# Altium PCB circuit.PcbDoc
Units mm, origin at the board's own origin, x right, y up, seen from the top; angles counter-clockwise.
Board outline 132 x 119 mm, 2 copper layers (Top Layer, Bottom Layer); 26 components, 21 nets, 104 pads, 2 vias.
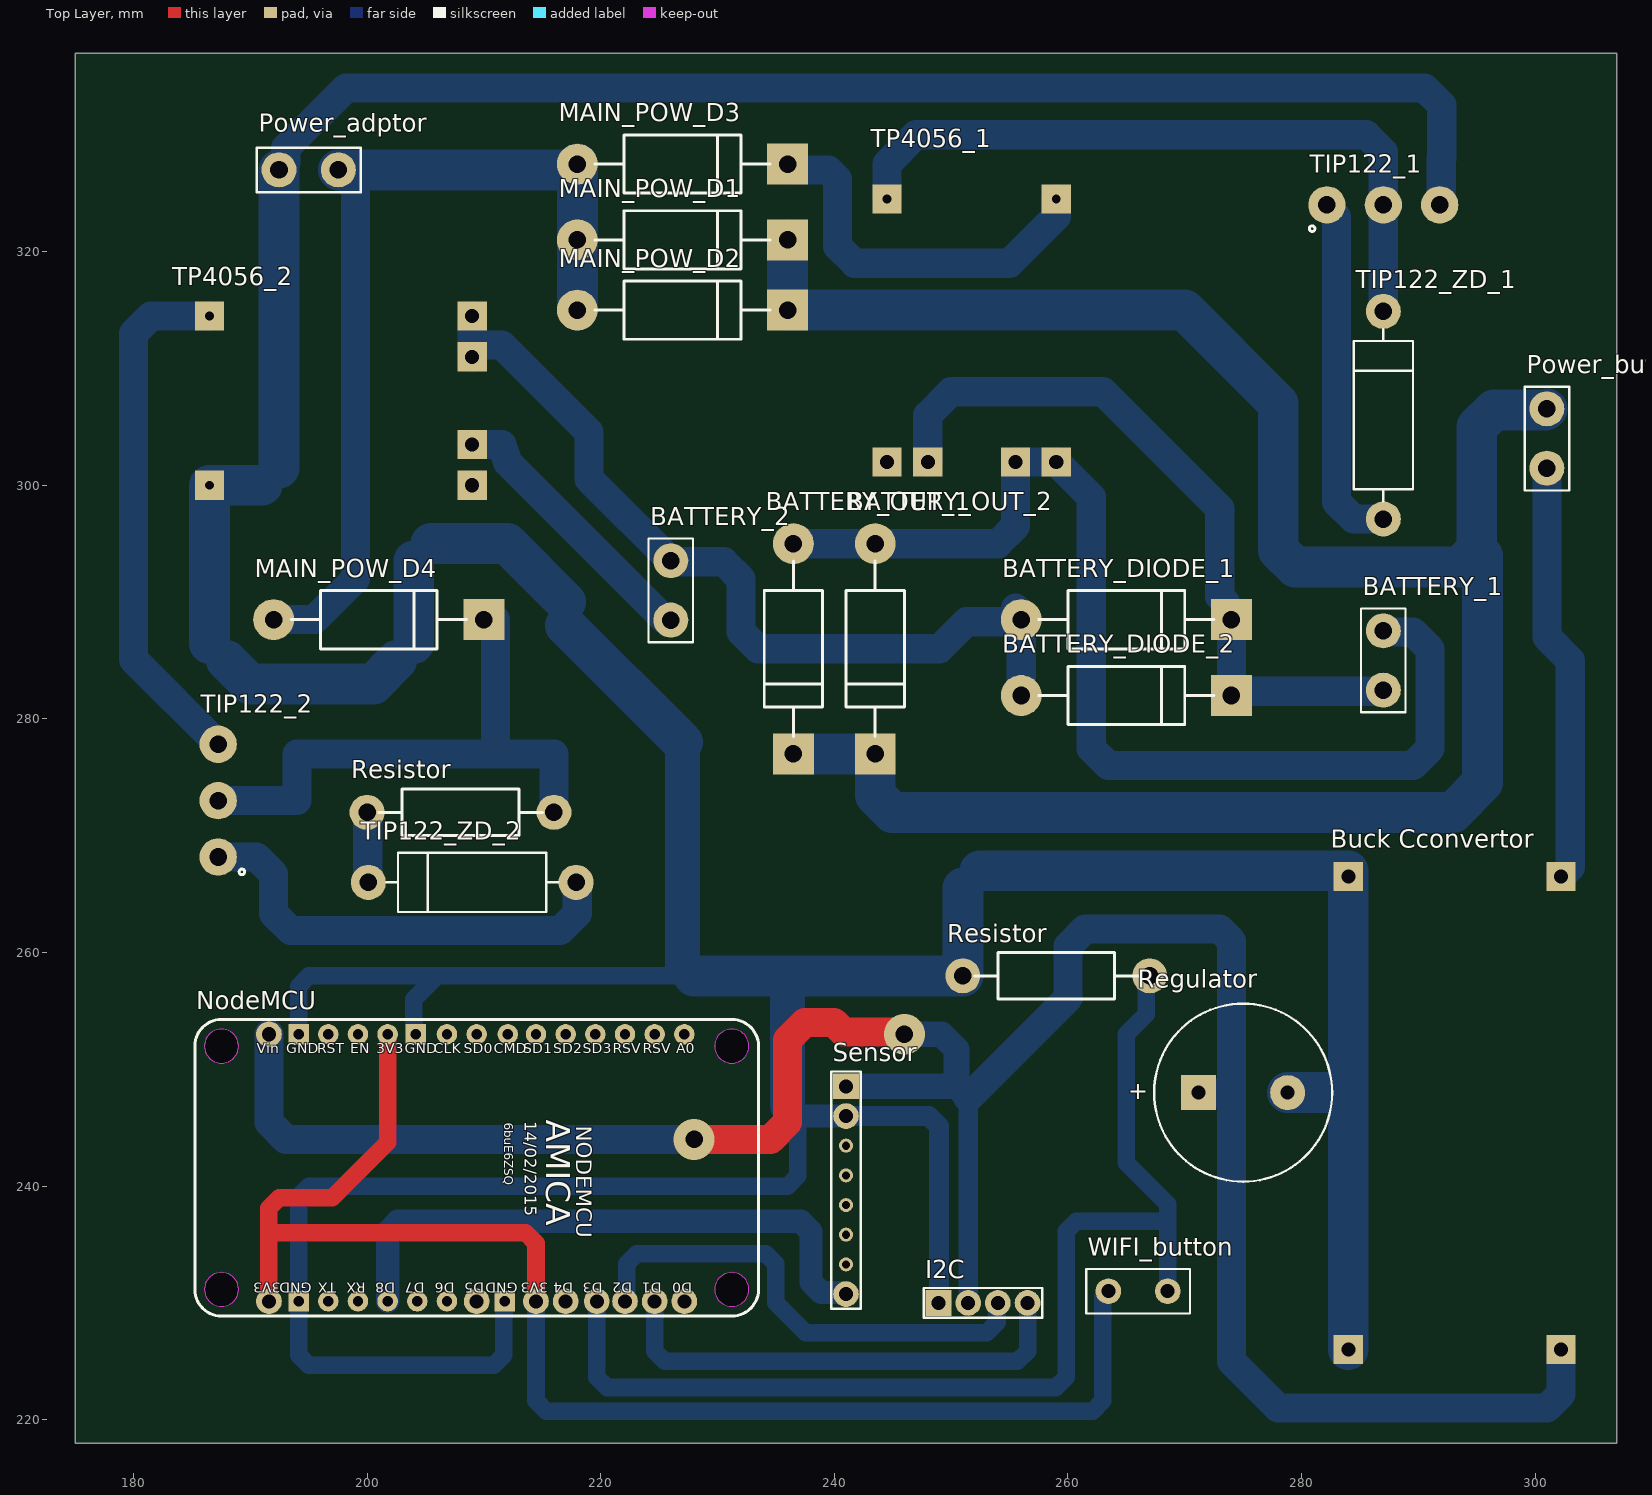
[diagram p0: Top Layer view]
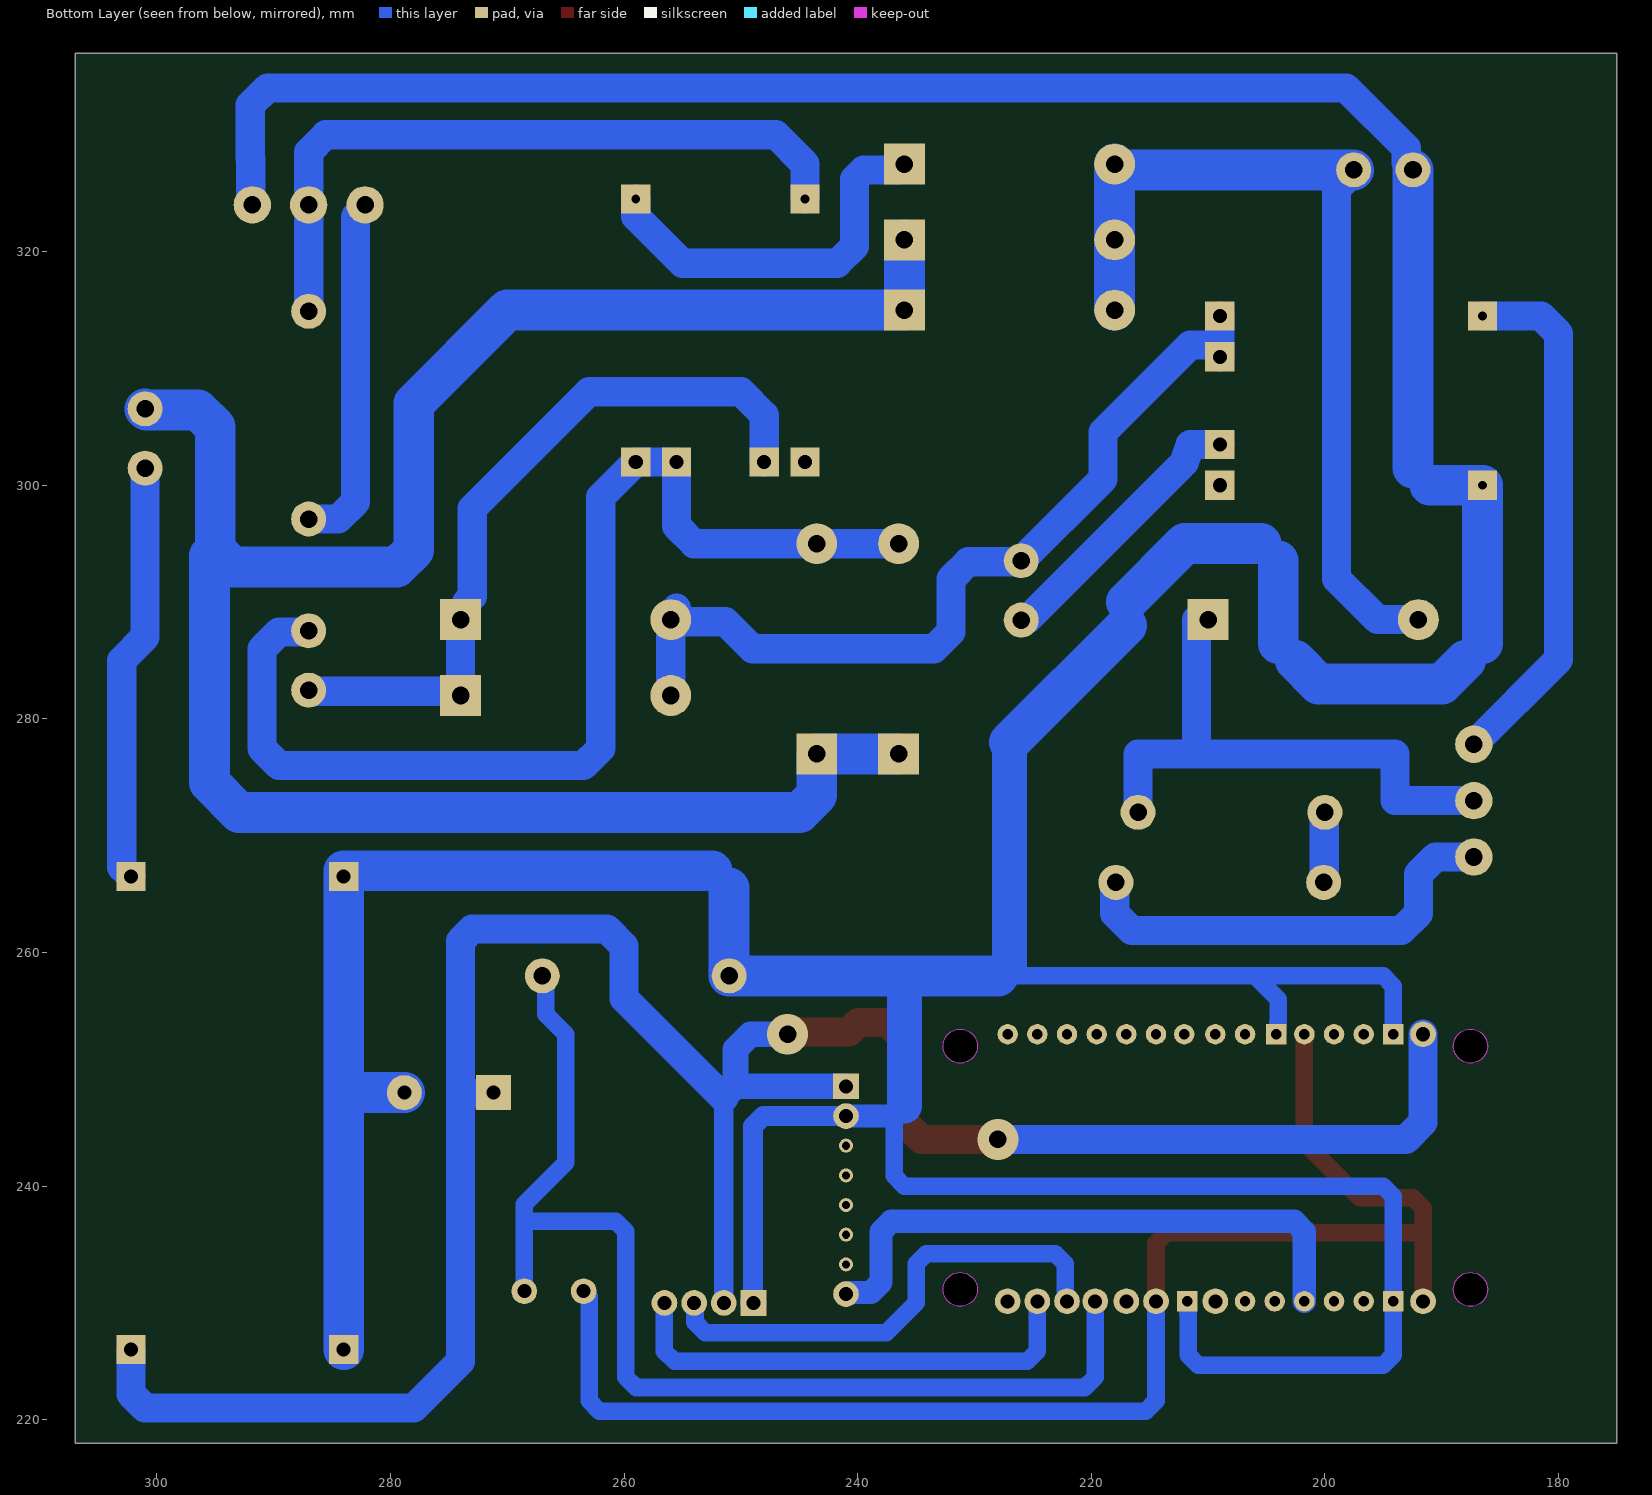
[diagram p1: Bottom Layer view, seen from below]

## Layer stack, top to bottom
Top Solder: solder mask 0.0102, Solder Resist, Dk 3.5
Top Layer: signal copper 0.0356
Dielectric 1: dielectric 0.32, FR-4, Dk 4.8
Bottom Layer: signal copper 0.0356
Bottom Solder: solder mask 0.0102, Solder Resist, Dk 3.5

## Board outline
175,337 307,337 307,218 175,218

## Design rules (kind name [scope] priority, off if disabled: settings)
Clearance [All] p1: gap=0.5 ignorepadtopadclearanceinfootprint=FALSE
PolygonConnect [All] p1: connectstyle=Relief reliefconductorwidth=0.254 reliefentries=4 polygonreliefangle="90 Angle" airgapwidth=0.254
RoomDefinition circuit [InComponentClass('circuit')] p1: confinementstyle=ConfineIn formatcopy=TRUE lockcomponents=FALSE outline 0,0 50.8,0 50.8,25.4 0,25.4
RoutingVias [All] p1: holewidth=0.711 width=1.27 viastyle="Through Hole" minholewidth=0.711 minwidth=1.27 maxholewidth=0.711 maxwidth=1.27
SolderMaskExpansion [All] p1: expansion=0.102 istentingtop=FALSE
Width [All] p1: maxlimit=5 minlimit=0.254 preferedwidth=2.5
30 further rules are at their usual default settings.

## Components (designator, comment, footprint, x,y, rotation, side; value= is the part's Value field where it differs from the comment)
BATTERY_1 "Jumper" RAD-0.2#1 287,285 r270 top
BATTERY_2 "Jumper" RAD-0.2#1 226,291 r270 top
BATTERY_DIODE_1 "Component_1" PCBComponent_1#1 260,286 r0 top
BATTERY_DIODE_2 "Component_1" PCBComponent_1#1 260,279.5 r0 top
BATTERY_OUT_1 "Component_1" PCBComponent_1#1 234,291 r270 top
BATTERY_OUT_2 "Component_1" PCBComponent_1#1 241,291 r270 top
"Buck Cconvertor" "Component_1" PCBComponent_1#2 282.4,268.1 r270 top
I2C "Header 4" HDR1X4 248.92,230 r0 top
MAIN_POW_D1 "Component_1" PCBComponent_1#1 222,318.5 r0 top
MAIN_POW_D2 "Component_1" PCBComponent_1#1 222,312.5 r0 top
MAIN_POW_D3 "Component_1" PCBComponent_1#1 222,325 r0 top
MAIN_POW_D4 "Component_1" PCBComponent_1#1 196,286 r0 top
NodeMCU "NodeMCU V1.0 ESP-12E" "NodeMCU V1.0 ESP-12E" 233.408,254.295 r270 top
Power_adptor "Jumper" RAD-0.2#1 195,327 r0 top
Power_button "Jumper" RAD-0.2#1 301,304 r270 top
Regulator "Cap Pol1" RB7.6-15 275,248 r180 top value=440uF
Resistor "470" PCBComponent_1#3 211,273 r180 top
Resistor "Component_1" PCBComponent_1#3 262,259 r180 top
Sensor "Header 8" HDR1X8 241,248.54 r270 top
TIP122_1 "Component_1" PCBComponent_1#4 287,324.254 r180 top
TIP122_2 "Component_1" PCBComponent_1#4 187,273 r270 top
TIP122_ZD_1 "6.2V" DIODE-0.7 287,306 r90 top
TIP122_ZD_2 "6.2V" DIODE-0.7 209,266 r180 top
TP4056_1 "Charging module of single cell" PCBComponent_1#5 243,327.8 r270 top
TP4056_2 "Charging module of single cell" PCBComponent_1#5 183.2,298.5 r0 top
WIFI_button "Jumper" RAD-0.2#2 266,231 r180 top

## Footprints (in the part's own frame and the unit in brackets; to place one, negate y for a bottom-side part, rotate by r counter-clockwise, add the part's x,y. Pads: shape width x height; smd on the part's side, far side on the other; paste and mask are expansions set on the pad)
DIODE-0.7 [mm] "Diode, Thru-Hole; 2 Leads; 0.7 in Pin Spacing"
  round 3 hole 1.5: 1(-8.89,0) 2(8.89,0)
  silkscreen extent -7.37,-2.54 7.37,2.54
HDR1X4 [mm] "Connector; Header; 4 Position"
  rect 2.2x2.2 hole 1.2: 1(0,0)
  round 2.2 hole 1.2: 2(2.54,0) 3(5.08,0) 4(7.62,0)
  silkscreen extent -1.27,-1.27 8.89,1.27
HDR1X8 [mm] "Connector; Header; 8 Position"
  rect 2.2x2.2 hole 1.2: 1(0,0)
  round 2.2 hole 1.2: 2(2.54,0) 8(17.78,0)
  round 1.2 hole 0.7: 3(5.08,0) 4(7.62,0) 5(10.16,0) 6(12.7,0) 7(15.24,0)
  silkscreen extent -1.27,-1.27 19.05,1.27
"NodeMCU V1.0 ESP-12E" [mil]
  round 115 hole 115 unplated paste-300 mask-300: 0(91,-86) 0(91,-1806) 0(911,-86) 0(911,-1806)
  round 69 hole 35: 3V3(51,-1246) A0(51,-246) CLK(51,-1046) CMD(51,-841) D6(951,-1046) D7(951,-1146) D8(951,-1246) EN(51,-1346) RST(51,-1446) RSV(51,-346) RSV(51,-446) RX(951,-1346) SD0(51,-946) SD1(51,-746) SD2(51,-646) SD3(51,-546) TX(951,-1446)
  round 86.61 hole 47.24: 3V3(951,-746) 3V3(951,-1646) D0(951,-246) D1(951,-346) D2(951,-446) D3(951,-541) D4(951,-646) D5(951,-946) VIN(51,-1646)
  rect 69x69 hole 35: GND(51,-1151) GND(51,-1546) GND(951,-851) GND(951,-1546)
  Keep-Out Layer circle w2: c911,-1806 r57.5
  Keep-Out Layer circle w2: c91,-1806 r57.5
  Keep-Out Layer circle w2: c911,-86 r57.5
  Keep-Out Layer circle w2: c91,-86 r57.5
  silkscreen extent 1,-1896 1001,4
PCBComponent_1#1 [mm]
  rect 3.5x3.5 hole 1.5: 1(14,2.5)
  round 3.5 hole 1.5: 2(-4,2.5)
  silkscreen extent -2.5,0 12.5,5
PCBComponent_1#2 [mm]
  rect 2.5x2.5 hole 1.2: 1(1.6,19.8) 2(1.6,1.6) 3(42.1,19.8) 4(42.1,1.6)
  body extent 0,0 43.7,21.4, height 2.5
PCBComponent_1#3 [mm]
  round 3 hole 1.5: 1(11,1) 2(-5,1)
  silkscreen extent -4,-1 10,3
PCBComponent_1#4 [mm]
  round 3.2 hole 1.5: 1(4.826,0.254) 2(0,0.254) 3(-4.826,0.254)
  silkscreen extent 5.86,2.05 6.33,2.52, body extent -6.5,-1.5 6.5,3, height 6
PCBComponent_1#5 [mm]
  rect 2.5x2.5 hole 0.762: 1(3.3,16) 2(3.3,1.5)
  rect 2.5x2.5 hole 1.2: 3(25.8,16) 4(25.8,12.5) 5(25.8,5) 6(25.8,1.5)
  body extent 0,3 24,14.6, height 3.5
RAD-0.2#1 [mm] "Radial Cap, Thru-Hole; 2 Leads; 0.2 in Pin Spacing"
  round 3 hole 1.5: 1(-2.54,0) 2(2.54,0)
  silkscreen extent -4.44,-1.9 4.45,1.91
RAD-0.2#2 [mm] "Radial Cap, Thru-Hole; 2 Leads; 0.2 in Pin Spacing"
  round 2.2 hole 1.2: 1(-2.54,0) 2(2.54,0)
  silkscreen extent -4.44,-1.9 4.45,1.91
RB7.6-15 [mm] "Polarized Capacitor (Radial); 2 Leads"
  rect 3x3 hole 1.2: 1(3.81,0)
  round 3 hole 1.2: 2(-3.81,0)
  silkscreen extent -7.62,-7.62 7.62,7.62

## Part data
BATTERY_1 BATTERY_2 Power_adptor Power_button WIFI_button: "Jumper Wire", LatestRevisionDate=17-Jul-2002, LatestRevisionNote="Re-released for DXP Platform.", PackageDescription="Radial Cap, Thru-Hole; 2 Leads; 0.2 in Pin Spacing", PackageReference=RAD-0.2, Published=24-Mar-1999, Publisher="Altium Limited"
I2C: "Header, 4-Pin", LatestRevisionDate=17-Jul-2002, LatestRevisionNote="Re-released for DXP Platform.", Publisher="Altium Limited"
NodeMCU: "NodeMCU V1.0 ESP8266 (ESP-12E)"
Regulator: "Polarized Capacitor (Radial)", LatestRevisionDate=17-Jul-2002, LatestRevisionNote="Re-released for DXP Platform.", PackageDescription="Polarized Capacitor (Radial); 2 Leads", PackageReference=RB7.6-15, Published=8-Jun-2000, Publisher="Altium Limited"
Resistor: library part Component_1
Sensor: "Header, 8-Pin", LatestRevisionDate=17-Jul-2002, LatestRevisionNote="Re-released for DXP Platform.", Publisher="Altium Limited"
TIP122_ZD_1 TIP122_ZD_2: library part "D Zener", "Zener Diode", LatestRevisionDate=17-Jul-2002, LatestRevisionNote="Re-released for DXP Platform.", PackageDescription="Diode, Thru-Hole; 2 Leads; 0.7 in Pin Spacing", PackageReference=DIODE-0.7, Published=8-Jun-2000, Publisher="Altium Limited"
TP4056_1 TP4056_2: library part "Tp4056 module"

## Via types
v1: diameter 3.5, hole 1.5, Top Layer to Bottom Layer, 2 vias

## Nets (pads, with @x,y where several pads share a name; then routed paths per layer and width w, separated by ;. In a path a pad name is that pad's centre, name@x,y a point inside that pad or via, vN(x,y) a via of type N, cw(c..) or ccw(c..) an arc to the next point about the centre after c; other vN are vias at no path point)
3.3V: NodeMCU.3V3 WIFI_button.2 | length 125.3
  Top Layer w1.5: NodeMCU.3V3@191.6,230.14 191.6,236 ; NodeMCU.3V3@201.76,253 201.76,243.76 197,239 192.479,239 191.6,238.121 191.6,236 ; NodeMCU.3V3@214.46,230.14 214.46,235.121 213.581,236 191.6,236
  Bottom Layer w1.5: NodeMCU.3V3@214.46,230.14 214.46,221.605 215.339,220.726 262.121,220.726 263,221.605 263,230.54 WIFI_button.2
12V: MAIN_POW_D1.2 MAIN_POW_D2.2 MAIN_POW_D3.2 MAIN_POW_D4.2 Power_adptor.2 | length 76.9
  Bottom Layer w2.5: MAIN_POW_D4.2@193,288.5 195.5,288.5 199,292 199,325.405 197.54,326.865 Power_adptor.2 ; MAIN_POW_D3.2@217,327 218,328 MAIN_POW_D3.2
  Bottom Layer w3.5: Power_adptor.2 199,327 MAIN_POW_D3.2@217,327 ; MAIN_POW_D2.2 MAIN_POW_D1.2 MAIN_POW_D3.2
+5: "Buck Cconvertor.3" I2C.2 NodeMCU.VIN Regulator.1 Sensor.1 | length 212.4
  Top Layer w2.5: v1(228,244) 234.536,244 236,245.464 236,252.536 237.464,254 239.964,254 240.773,253.191 245.809,253.191 v1(246,253)
  Bottom Layer w1.7: I2C.2 251.46,247.54
  Bottom Layer w2.2: Sensor.1 250.46,248.54 ; v1(246,253) 249.171,253 250.46,251.711 250.46,248.54 ; 251.46,247.54 250.46,248.54
  Bottom Layer w2.5: NodeMCU.VIN 191.6,245.464 193.064,244 v1(228,244) ; 251.46,247.54 260,256.08 260,260.536 261.464,262 272.996,262 274,260.996 274,247.904 ; Regulator.1 271.286,247.904 274,247.904 ; 302.2,226 302.2,222.2 301,221 278,221 274,225 274,247.904
D3: NodeMCU.D3 Resistor.2@267,258 WIFI_button.1 | length 98.2
  Bottom Layer w1.5: NodeMCU.D3 219.667,223.637 220.546,222.758 258.963,222.758 259.842,223.637 259.842,236.121 260.721,237 268.54,237 ; Resistor.2@267,258 266.713,257.713 266.713,254.713 265,253 265,242 268.54,238.46 268.54,237 ; WIFI_button.1 268.54,237
D8: NodeMCU.D8 Sensor.8 | length 50.7
  Bottom Layer w2: NodeMCU.D8 201.76,236.103 202.639,236.982 237.121,236.982 238,236.103 238,231.773 238.879,230.894 240.866,230.894 Sensor.8
GND: "Buck Cconvertor.2" "Buck Cconvertor.4" I2C.1 NodeMCU.GND Power_adptor.1 Regulator.2 Resistor.1@251,258 Sensor.2 TIP122_1.3 TP4056_2.2 | length 515.9
  Bottom Layer w1.5: NodeMCU.GND@194.14,253 194.14,257.121 195.019,258 206,258 ; NodeMCU.GND@204.173,253 204.047,253.126 204.047,253.953 204,254 204,256 206,258 ; NodeMCU.GND@211.793,230.14 211.73,230.077 211.73,229.167 211.709,229.146 211.709,225.542 210.83,224.663 195.019,224.663 194.14,225.542 194.14,230.14 194.14,239.121 195.019,240 236,240 236.879,240.879 236.879,246 236,246.879 ; 227,258 206,258
  Bottom Layer w1.7: Sensor.2 248.081,246 248.96,245.121 I2C.1@248.96,230.04
  Bottom Layer w2: 236.879,246 Sensor.2
  Bottom Layer w2.2: I2C.1 I2C.1@248.96,230.04
  Bottom Layer w2.5: 186.5,286.464 187.964,285 ; 190.996,300 192.46,301.464 ; Power_adptor.1 193.04,327.58 193.04,328.864 198.19,334.014 290.536,334.014 292,332.55 292,328 291.96,327.96 291.96,324.134 TIP122_1.3 ; 202.536,285 204,286.464 ; 204,293.536 205.464,295 ; 217,288 217,290 ; 227,259 228,258 ; 251,265.536 252.464,267
  Bottom Layer w3: 227,259 227,278 ; 236,246.879 236,258
  Bottom Layer w3.5: 186.5,286.464 TP4056_2.2 190.996,300 ; 187.964,285 189.964,283 200.536,283 202.536,285 ; 192.46,301.464 Power_adptor.1 ; 204,286.464 204,293.536 ; 205.464,295 212,295 217,290 ; 217,288 227,278 ; 228,258 236,258 251,258 251,265.536 ; 252.464,267 284,267 ; Regulator.2 284,248 ; 284,226 284,248 ; 284,266.5 284,248
NetBATTERY_1_1: BATTERY_1.1 BATTERY_OUT_1.2 BATTERY_OUT_2.2 TP4056_1.3 TP4056_1.4 | length 97.8
  Bottom Layer w2.5: BATTERY_OUT_1.2 BATTERY_OUT_2.2 254,295 255.5,296.5 TP4056_1.4 TP4056_1.3 262,299 262,277.464 263.464,276 289.536,276 291,277.464 291,285.98 289.536,287.444 287.096,287.444 BATTERY_1.1
NetBATTERY_1_2: BATTERY_1.2 BATTERY_DIODE_1.1 BATTERY_DIODE_2.1 TP4056_1.5 | length 64.6
  Bottom Layer w2.5: TP4056_1.5 248,306 250,308 263,308 273,298 273,290.464 273.5,289.964 273.5,289 BATTERY_DIODE_1.1 274,281.5 BATTERY_DIODE_2.1 274.364,282.364 286.904,282.364 BATTERY_1.2
NetBATTERY_2_1: BATTERY_2.1 BATTERY_DIODE_1.2 BATTERY_DIODE_2.2 TP4056_2.3 TP4056_2.4 | length 72.8
  Bottom Layer w2.5: TP4056_2.4 209,312 209,314 TP4056_2.3 ; TP4056_2.4@210,312 211.536,312 219,304.536 219,300.54 226.096,293.444 230.536,293.444 232,291.98 232,287.464 233.464,286 249,286 251.309,288.309 255.809,288.309 BATTERY_DIODE_1.2 BATTERY_DIODE_1.2@256,288.771 ; BATTERY_DIODE_1.2@255.5,289.271 BATTERY_DIODE_1.2@255.5,289.5 ; BATTERY_DIODE_2.2@256,281.5 BATTERY_DIODE_1.2@256,287.5
NetBATTERY_2_2: BATTERY_2.2 TP4056_2.5 | length 23.7
  Bottom Layer w2.5: TP4056_2.5 211.536,303.5 211.853,302.53 212.038,301.962 212.461,301.539 225.444,288.556 225.904,288.556 BATTERY_2.2
"NetBuck Cconvertor_1": "Buck Cconvertor.1" Power_button.2 | length 36.1
  Bottom Layer w2.5: Power_button.2 301,287 303,285 303,267.3 302.2,266.5
NetMAIN_POW_D3_1: MAIN_POW_D3.1 TP4056_1.1 | length 33
  Bottom Layer w2.5: MAIN_POW_D3.1 236.5,327 239.48,327 240.284,326.196 240.284,320.464 241.748,319 255,319 259,323 TP4056_1.1
NetMAIN_POW_D4_1: MAIN_POW_D4.1 Resistor.2@216,272 TIP122_2.2 | length 49.2
  Bottom Layer w2.5: TIP122_2.2 194,273 194,277 195,277 211,277 ; MAIN_POW_D4.1@211,288.5 211,277 ; Resistor.2@216,272 216,277 211,277
NetResistor_1: Resistor.1@200,272 TIP122_ZD_2.2 | length 6
  Bottom Layer w2.5: Resistor.1@200,272 200.055,271.945 200.055,266.055 TIP122_ZD_2.2
NetTIP122_1_1: TIP122_1.1 TIP122_ZD_1.1 | length 30.4
  Bottom Layer w2.5: TIP122_1.1 282.174,323.811 283,322.985 283,298.574 284.464,297.11 TIP122_ZD_1.1
NetTIP122_2_1: TIP122_2.1 TIP122_ZD_2.1 | length 38.6
  Bottom Layer w2.5: TIP122_2.1 190.536,268.174 192,266.71 192,263.338 193.464,261.874 216.536,261.874 218,263.338 218,265.755 217.986,265.769 TIP122_ZD_2.1@217.986,265.986
NetTIP122_2_3: TIP122_2.3 TP4056_2.1 | length 45.3
  Bottom Layer w2.5: TP4056_2.1 181.5,314.5 180,313 180,285.08 TIP122_2.3
POWER_INPUT: BATTERY_OUT_1.1 BATTERY_OUT_2.1 MAIN_POW_D1.1 MAIN_POW_D2.1 Power_button.1 | length 183.5
  Bottom Layer w3.5: MAIN_POW_D1.1 MAIN_POW_D2.1 270,315 278,307 278,294.464 279.464,293 293.536,293 295,294.464 ; BATTERY_OUT_1.1 BATTERY_OUT_2.1 243.5,273.464 244.964,272 292.95,272 295.5,274.55 295.5,293.964 295,294.464 ; Power_button.1 300.904,306.444 296.464,306.444 295,304.98 295,294.464
SCL: I2C.4 NodeMCU.D1 | length 41
  Bottom Layer w1.5: NodeMCU.D1 224.62,225.879 225.499,225 255.661,225 256.54,225.879 I2C.4
SDA: I2C.3 NodeMCU.D2 | length 42.2
  Bottom Layer w1.5: NodeMCU.D2 222.214,230.274 222.214,233.341 223.093,234.22 234.121,234.22 235,233.341 235,230 237.543,227.457 253.048,227.457 253.927,228.336 253.927,229.927 I2C.3
TP4056_GND: TIP122_1.2 TIP122_ZD_1.2 TP4056_1.2 | length 60.8
  Bottom Layer w2.5: TP4056_1.2 244.5,327.5 247,330 285.536,330 287,328.536 TIP122_1.2 TIP122_ZD_1.2
pads on no net: NodeMCU.0 NodeMCU.A0 NodeMCU.CLK NodeMCU.CMD NodeMCU.D0 NodeMCU.D4 NodeMCU.D5 NodeMCU.D6 NodeMCU.D7 NodeMCU.EN NodeMCU.RST NodeMCU.RSV NodeMCU.RX NodeMCU.SD0 NodeMCU.SD1 NodeMCU.SD2 NodeMCU.SD3 NodeMCU.TX Sensor.3 Sensor.4 Sensor.5 Sensor.6 Sensor.7 TP4056_1.6 TP4056_2.6

## Text inside footprints (layer, text, board x,y; h text height)
NodeMCU: Top Overlay "14/02/2015" at 213.139,245.532 h1.75 r270; Top Overlay "AMICA" at 214.638,245.685 h3.56 r270; Top Overlay "NODEMCU" at 217.432,245.151 h2.29 r270; Top Overlay "6buE6ZSQ" at 211.742,245.431 h0.76 r270; Top Overlay "CLK" at 205.722,251.095 h1.52; Top Overlay "SD0" at 208.273,251.095 h1.52; Top Overlay "SD1" at 213.375,251.095 h1.52; Top Overlay "SD2" at 215.926,251.095 h1.52; Top Overlay "SD3" at 218.477,251.095 h1.52; Top Overlay "RSV" at 221.028,251.095 h1.52; Top Overlay "RSV" at 223.579,251.095 h1.52; Top Overlay "A0" at 226.474,251.095 h1.52; Top Overlay "D5" at 210.015,232.045 h1.52 r180; Top Overlay "GND" at 212.911,232.045 h1.52 r180; Top Overlay "3V3" at 215.501,232.045 h1.52 r180; Top Overlay "D4" at 217.66,232.045 h1.52 r180; Top Overlay "D3" at 220.16,232.045 h1.52 r180; Top Overlay "D2" at 222.7,232.045 h1.52 r180; Top Overlay "D1" at 225.246,232.045 h1.52 r180; Top Overlay "D0" at 227.82,232.045 h1.52 r180; Top Overlay "CMD" at 210.824,251.095 h1.52; Top Overlay "D6" at 207.497,232.045 h1.52 r180; Top Overlay "3V3" at 192.616,232.045 h1.52 r180; Top Overlay "GND" at 195.252,232.045 h1.52 r180; Top Overlay "TX" at 197.366,232.045 h1.52 r180; Top Overlay "RX" at 199.879,232.045 h1.52 r180; Top Overlay "D8" at 202.392,232.045 h1.52 r180; Top Overlay "D7" at 204.929,232.045 h1.52 r180; Top Overlay "Vin" at 190.559,251.095 h1.52; Top Overlay "GND" at 193.099,251.095 h1.52; Top Overlay "RST" at 195.715,251.095 h1.52; Top Overlay "EN" at 198.56,251.095 h1.52; Top Overlay "3V3" at 200.769,251.095 h1.52; Top Overlay "GND" at 203.233,251.095 h1.52
Regulator: Top Overlay "+" at 266.868,248.737 h1.5 r180